# EAGLE board interstage_A1 (EAGLE 9.2.2)
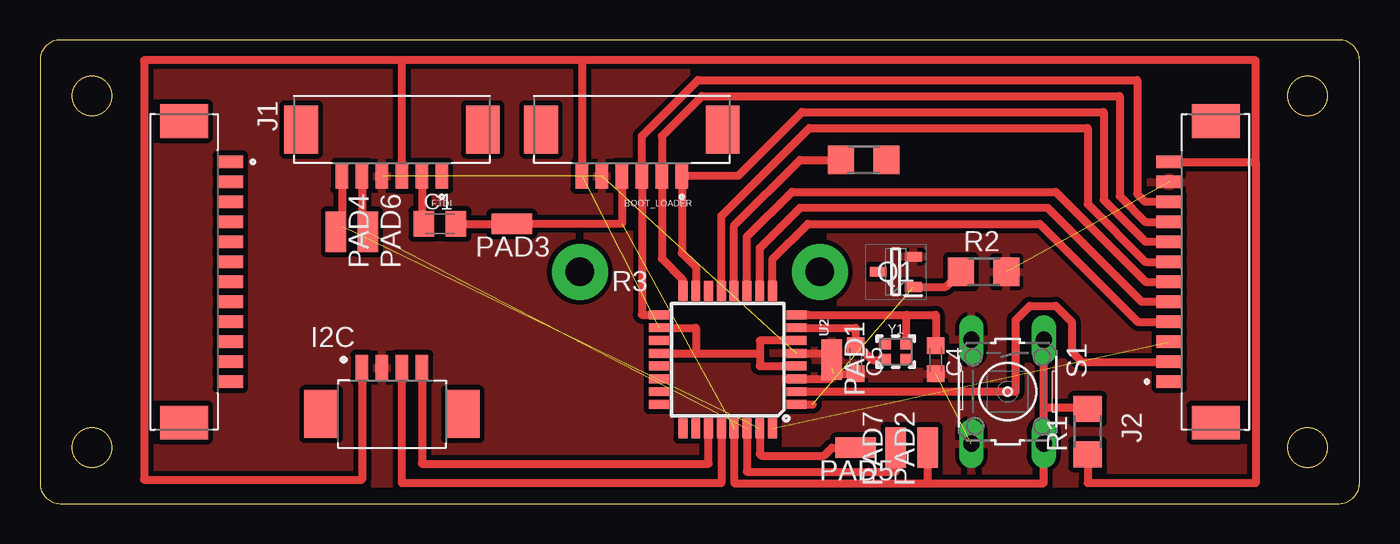
[diagram p0: board, top side]

Size 82.5 x 29 mm. Coordinates in mm from the lower left corner, seen from the top.
Outline: 0,1.27 arc90 1.27,0 81.23,0 arc90 82.5,1.27 82.5,27.73 arc90 81.23,29 1.27,29 arc90 0,27.73 0,1.27
Outline: circle at 79.25,3.5 radius 1.25
Outline: circle at 3.25,25.5 radius 1.25
Outline: circle at 3.25,3.5 radius 1.25
Outline: circle at 79.25,25.5 radius 1.25
Copper layers (1*16): Top 0.035mm / dielectric 1.5mm / Bottom 0.035mm
Design rules "default": minimum track width 6mil, minimum drill 0.35mm, track to track 6mil, track to pad 6mil, pad to pad 6mil, via to via 6mil, smd to smd 6mil, copper to edge 40mil, drill to drill 6mil, minimum pad ring 10mil, minimum via ring 8mil, stop-mask expansion 4mil, vias tented up to drill 0mil, thermal gap 10mil

## Footprints (pad centres in the part's own frame; a part is rotated, then mirrored left to right if it is on the bottom)
MOLEX_0532610671 = smd 0.8 x 1.6: 1 -3.125,0; 2 -1.875,0; 3 -0.625,0; 4 0.625,0; 5 1.875,0; 6 3.125,0 | smd 2.1 x 3: S1 -5.675,-2.9; S2 5.675,-2.9
C0805K = smd 1.3 x 1.6: 1 -1,0; 2 1,0
C0603K = smd 1.05 x 1.08: 1 -0.875,0; 2 0.875,0
MOLEX_0532610471 = smd 0.8 x 1.6: 1 -1.875,0; 2 -0.625,0; 3 0.625,0; 4 1.875,0 | smd 2.1 x 3: S1 -4.425,-2.9; S2 4.425,-2.9
MOLEX_0532611271 = smd 0.8 x 1.6: 1 -6.875,2.9; 2 -5.625,2.9; 3 -4.375,2.9; 4 -3.125,2.9; 5 -1.875,2.9; 6 -0.625,2.9; 7 0.625,2.9; 8 1.875,2.9; 9 3.125,2.9; 10 4.375,2.9; 11 5.625,2.9; 12 6.875,2.9 | smd 2.1 x 3: S1 -9.425,0; S2 9.425,0
SMD1,27-2,54 = smd 1.27 x 2.54: 1 0,0
SOT95P230X110-3N = smd 1.05 x 0.6: 1 -1.1,0.95; 2 -1.1,-0.95; 3 1.1,0
R1206 = smd 1.6 x 1.803: 1 -1.422,0; 2 1.422,0
B3F-10XX = drill 1.016 long: 1 -3.251,2.261; 2 3.251,2.261; 3 -3.251,-2.261; 4 3.251,-2.261
TQFP32-08 = smd 1.27 x 0.559: 1 -4.293,2.8; 2 -4.293,2; 3 -4.293,1.2; 4 -4.293,0.4; 5 -4.293,-0.4; 6 -4.293,-1.2; 7 -4.293,-2; 8 -4.293,-2.8; 17 4.293,-2.8; 18 4.293,-2; 19 4.293,-1.2; 20 4.293,-0.4; 21 4.293,0.4; 22 4.293,1.2; 23 4.293,2; 24 4.293,2.8 | smd 0.559 x 1.27: 9 -2.8,-4.293; 10 -2,-4.293; 11 -1.2,-4.293; 12 -0.4,-4.293; 13 0.4,-4.293; 14 1.2,-4.293; 15 2,-4.293; 16 2.8,-4.293; 25 2.8,4.293; 26 2,4.293; 27 1.2,4.293; 28 0.4,4.293; 29 -0.4,4.293; 30 -1.2,4.293; 31 -2,4.293; 32 -2.8,4.293
CRYSTAL-SMD-2.0X1.6MM = smd 0.75 x 0.7: 1 -0.675,-0.5; 2 0.675,-0.5; 3 0.675,0.5; 4 -0.675,0.5

## Placement (x,y rotation side)
BOOT_LOADER  0532610671  [MOLEX_0532610671]  37,20.5 180 top
C1  100nF  [C0805K]  25,17.5 0 top
C4  22pF  [C0603K]  56,9 270 top
C5  22pF  [C0603K]  51,9 270 top
FTDI  0532610671  [MOLEX_0532610671]  22,20.5 180 top
I2C  0532610471  [MOLEX_0532610471]  22,8.5 0 top
J1  0532611271  [MOLEX_0532611271]  9,14.5 270 top
J2  0532611271  [MOLEX_0532611271]  73.5,14.5 90 top
PAD1  WIREPADSMD1,27-254  [SMD1,27-2,54]  49.5,9 180 top
PAD2  WIREPADSMD1,27-254  [SMD1,27-2,54]  55.5,3.5 0 top
PAD3  WIREPADSMD1,27-254  [SMD1,27-2,54]  29.5,17.5 90 top
PAD4  WIREPADSMD1,27-254  [SMD1,27-2,54]  18.5,17 180 top
PAD5  WIREPADSMD1,27-254  [SMD1,27-2,54]  51,3.5 90 top
PAD6  WIREPADSMD1,27-254  [SMD1,27-2,54]  20.5,17 180 top
PAD7  WIREPADSMD1,27-254  [SMD1,27-2,54]  53.5,3.5 0 top
Q1  PMV16XNR  [SOT95P230X110-3N]  53.5,14.5 180 top
R1  10kohm  [R1206]  65.5,4.5 90 top
R2  330 Ohm  [R1206]  59,14.5 0 top
R3  330 Ohm  [R1206]  51.5,21.5 0 top
S1  [B3F-10XX]  60.5,7 270 top
U2  ATMEGA328P_TQFP  [TQFP32-08]  43,9 180 top
Y1  16MHz  [CRYSTAL-SMD-2.0X1.6MM]  53.5,9.5 0 top

## Library data of the parts
BOOT_LOADER FTDI = picoblade6; DESCRIPTION: Picoblade Connector, 6 Circuit Single Row, Right Angle Surface Mount SMT PCB; DIGI-KEY_PART_NUMBER: WM7624CT-ND; DIGI-KEY_PURCHASE_URL: https://www.digikey.com/product-detail/en/molex/0532610671/WM7624CT-ND/699111?utm_source=snapeda&utm_medium=aggregator&utm_campaign=symbol; MF: Molex; MP: 0532610671; PACKAGE: None
C1 C4 C5 = rcl; SPICEPREFIX: C
I2C = 0532610471; AVAILABILITY: Unavailable; DESCRIPTION: Picoblade Connector, 4 Circuit Single Row, Right Angle Surface Mount SMT PCB; MF: Molex; MP: 0532610471; PACKAGE: None; PRICE: None
J1 J2 = picoblade; AVAILABILITY: Unavailable; DESCRIPTION: Picoblade Connector, 12 Circuit Single Row, Right Angle Surface Mount SMT PCB; MF: Molex; MP: 0532611271; PACKAGE: None; PRICE: None
PAD1-PAD7 = wirepad
Q1 = SamacSys_Parts; DESCRIPTION: Nexperia PMV16XNR N-channel MOSFET, 8.6 A, 20 V PMV16XN, 3-Pin SOT-23; HEIGHT: 1.1mm; MANUFACTURER_NAME: Nexperia; MANUFACTURER_PART_NUMBER: PMV16XNR; MOUSER_PART_NUMBER: 771-PMV16XNR; MOUSER_PRICE-STOCK: https://www.mouser.com/Search/Refine.aspx?Keyword=771-PMV16XNR
R1-R3 = rcl; SPICEPREFIX: R
S1 = switch-omron; MPN: B3F-1000; OC_FARNELL: 176432; OC_NEWARK: 36M3542
U2 = SparkFun-IC-Microcontroller; PROD_ID: IC-09069
Y1 = SparkFun-Clocks; PROD_ID: XTAL-14681

## Nets
AIN0: J2.5 U2.10
AIN1: J2.6 U2.11
DTR: C1.1 FTDI.2
GND: BOOT_LOADER.5 C4.2 C5.2 FTDI.4 I2C.2 J2.11 PAD1.1 Q1.2 R2.2 S1.3 S1.4 U2.3 U2.5
ICP: R3.1 U2.12
INT0: J2.3 U2.32
INT1: Q1.1 R2.1 U2.1
MISO: BOOT_LOADER.2 J2.9 U2.16
MOSI: BOOT_LOADER.1 J2.8 U2.15
N$1: C5.1 U2.7 Y1.1
N$2: C4.1 U2.8 Y1.3
N$4: Q1.3
N$6: U2.14
N$18: R3.2
OC1A: J2.7 U2.13
RST: BOOT_LOADER.4 C1.2 PAD2.1 PAD3.1 R1.2 S1.1 S1.2 U2.29
RXD: FTDI.5 PAD6.1 PAD7.1 U2.30
SCK: BOOT_LOADER.3 J2.10 U2.17
SCL: I2C.3 U2.28
SDA: I2C.4 U2.27
T0: J2.2 U2.2
T1: J2.4 U2.9
TXD: FTDI.6 PAD4.1 PAD5.1 U2.31
VCC: BOOT_LOADER.6 FTDI.3 I2C.1 J2.12 R1.1 U2.4 U2.6 U2.18 U2.20

## Tracks (layer width: path | path; a pad name or v marks a point on that pad's centre or on a via)
AIN0
  Top 0.5: 70.47,12.5 J2.5 68.88,12.62 63,18.5 47.5,18.5 45,16 U2.10
AIN1
  Top 0.5: U2.11 44.2,16.7 47,19.5 63.5,19.5 69.12,13.88 J2.6
DTR
  Top 0.5: C1.1 24,17.38 23.88,17.5 FTDI.2
GND  (5 unrouted)
  Top 0.5: U2.5 49.1,9.4 PAD1.1 49.5,8.5 | C5.2 49.62,8.12 49.3,7.8 U2.3
  pour Top (isolate 0.305): 6,28.5 6,0.5 77,0.5 77,28.5
ICP
  Top 0.5: R3.1 47.5,21.5 43.4,17.4 U2.12
INT0  (1 unrouted)
INT1  (1 unrouted)
  Top 0.5: U2.1 48.3,6.2 | Q1.1 56.63,13.55 R2.1
MISO
  Top 0.5: U2.16 40.2,14 38.88,15.32 BOOT_LOADER.2 38.88,23 41.38,25.5 67.5,25.5 67.5,19.23 69.1,17.62 J2.9
MOSI
  Top 0.5: J2.8 69.12,16.38 66.5,19 66.5,24.5 47.62,24.5 43.62,20.5 BOOT_LOADER.1 40.12,15.67 41,14.79 U2.15
N$1
  Top 0.5: U2.7 51,11 C5.1 51.12,9.88 52,9 Y1.1
N$2
  Top 0.5: U2.8 48,11.8 54.17,11.8 | Y1.3 54.17,11.8 | C4.1 56,11.8 54.17,11.8
N$3  (via drill 1.8 pad 3.5)
  other vias: 33.75,14.5
N$5  (via drill 1.8 pad 3.5)
  other vias: 48.75,14.5
OC1A
  Top 0.5: J2.7 69.1,15.12 65.5,18.73 65.5,23.5 48.1,23.5 42.6,18 U2.13
RST  (1 unrouted)
  Top 0.5: U2.29 43.4,1.27 55.5,1.27 | 55.5,1.27 62.76,1.27 S1.2 62.76,6 | 62.76,6 S1.1 | R1.2 65.42,6 62.76,6 | 55.5,1.27 PAD2.1 | BOOT_LOADER.4 36.38,17.5 PAD3.1 C1.2
RXD  (1 unrouted)
  Top 0.5: U2.30 44.2,2 53.5,2 PAD7.1 | FTDI.5 20.12,17.38 PAD6.1
SCK
  Top 0.5: U2.17 37.62,11.8 BOOT_LOADER.3 37.62,23 41.12,26.5 68.6,26.5 68.6,19.38 69.1,18.88 J2.10
SCL
  Top 0.5: U2.28 42.6,1.27 22.62,1.27 I2C.3
SDA
  Top 0.5: U2.27 41.8,2.5 23.88,2.5 I2C.4
T0
  Top 0.5: U2.2 61,7 61,11.5 61.88,12.38 63.5,12.38 64.5,11.38 64.5,9.5 65,9 64.97,9 65.1,8.88 J2.2
T1
  Top 0.5: U2.9 45.8,15.3 48,17.5 62.5,17.5 68.62,11.38 J2.4
TXD  (1 unrouted)
  Top 0.5: FTDI.6 18.88,17.38 PAD4.1 | U2.31 45,3.1 45.1,3 49,3 49.5,3.5 PAD5.1
VCC  (1 unrouted)
  Top 0.5: 76,21.38 76,27.73 33.88,27.73 | J2.12 76,21.38 | U2.4 45,8.6 45,9.4 | U2.6 45,10.2 45,9.4 | U2.20 41,9.4 | 41,9.4 45,9.4 | U2.18 41,11 41,9.4 | I2C.1 20.12,1.5 6.5,1.5 6.5,27.73 22.5,27.73 | 33.88,27.73 BOOT_LOADER.6 | 33.88,27.73 22.5,27.73 | 76,21.38 76,1.27 65.5,1.27 R1.1 | FTDI.3 22.62,27.61 22.5,27.73